# Altium PCB DriverPNP_Pcb.PcbDoc
Units mil, origin at the board's own origin, x right, y up, seen from the top; angles counter-clockwise.
Board outline 400 x 900 mil, 2 copper layers (Top Layer, Bottom Layer); 19 components, 26 nets, 60 pads, 4 vias.
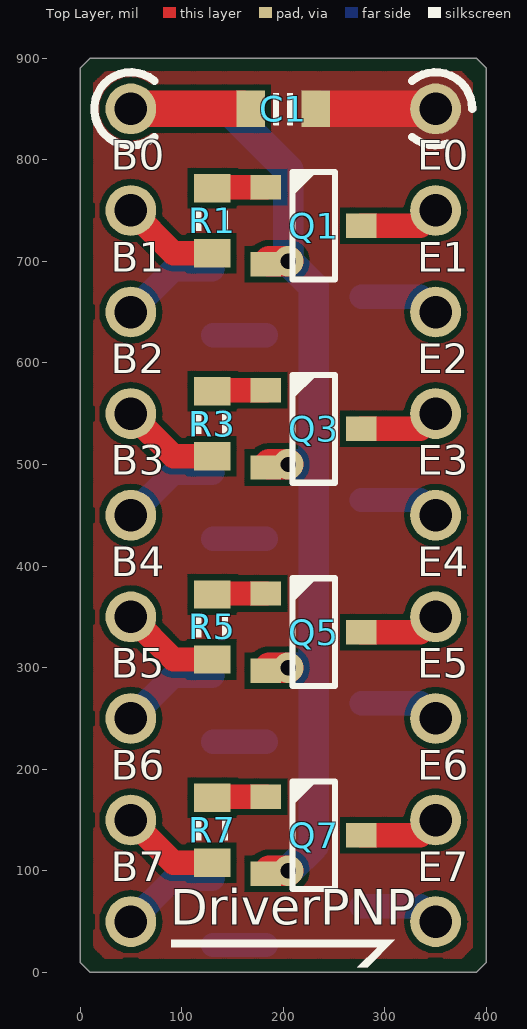
[diagram p0: Top Layer view]
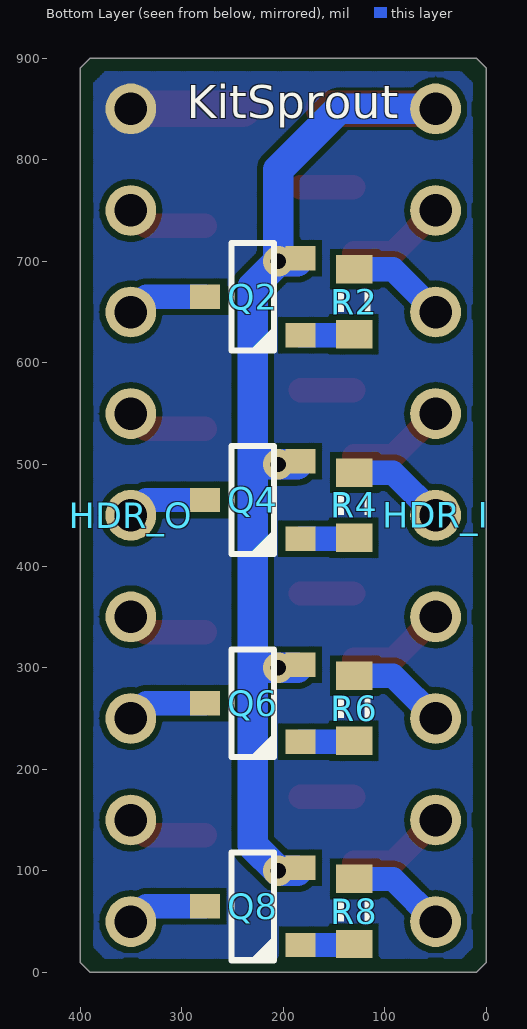
[diagram p1: Bottom Layer view, seen from below]
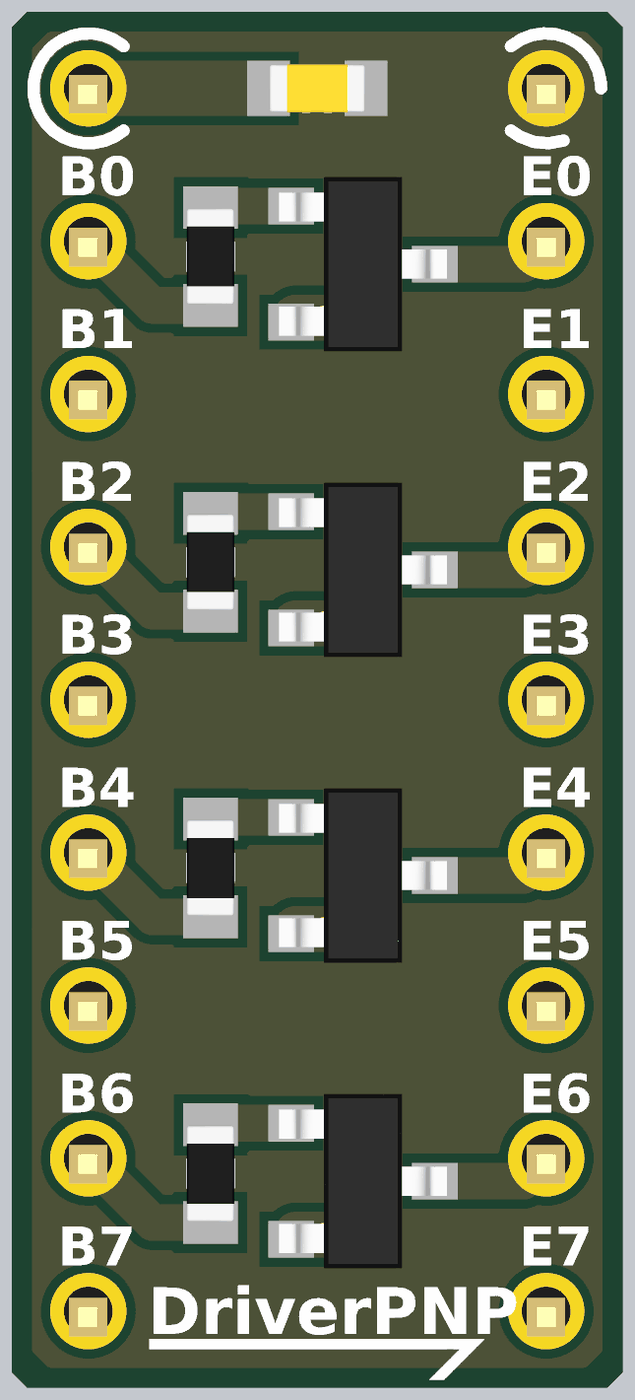
[diagram p2: 3D render of the assembled board from above, using the file's embedded part models]
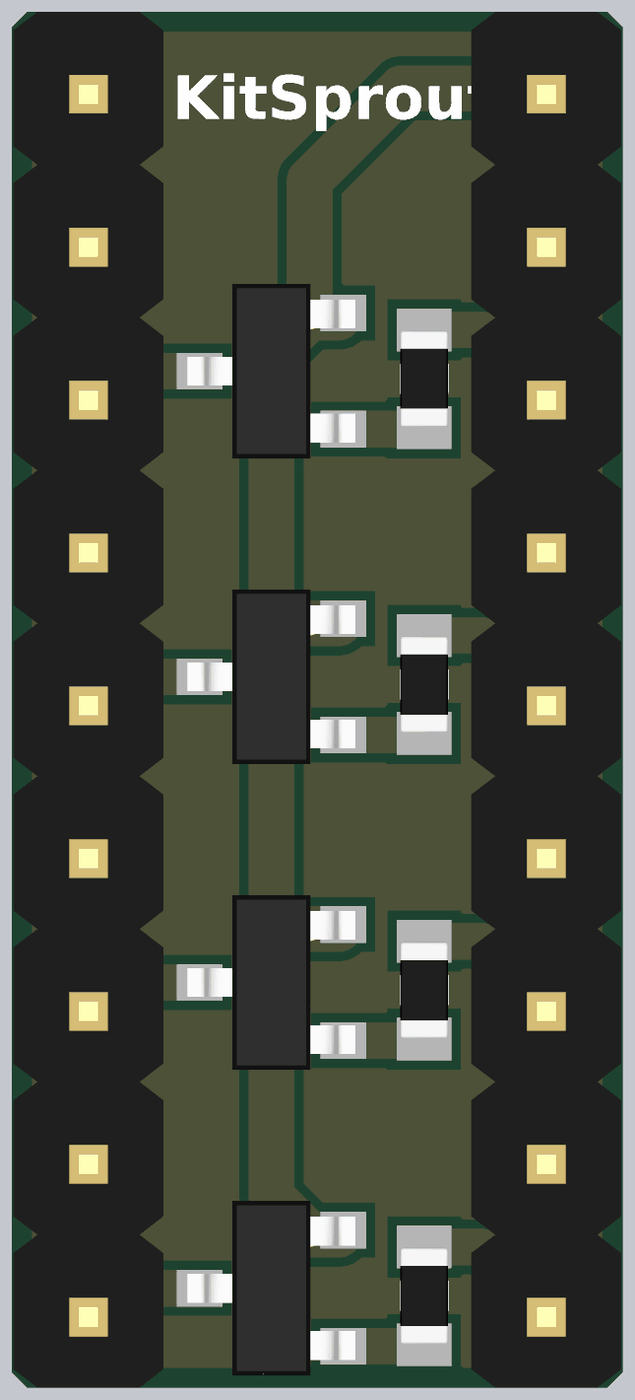
[diagram p3: 3D render of the assembled board from below, using the file's embedded part models]

## Layer stack, top to bottom
Top Solder: solder mask 0.4, Solder Resist, Dk 3.5
Top Layer: signal copper 1.4
Dielectric1: dielectric 12.6, FR-4, Dk 4.8
Bottom Layer: signal copper 1.4
Bottom Solder: solder mask 0.4, Solder Resist, Dk 3.5

## Board outline
0,10 10,0 390,0 400,10 400,890 390,900 10,900 0,890

## Design rules (kind name [scope] priority, off if disabled: settings)
Clearance ClearancePolygon [InPolygon] p1: gap=6
Clearance [All] p2: gap=6
ComponentClearance [All] p1: gap=0 collisioncheckmode=3 verticalgap=0 showdistances=FALSE
Height [All] p1: minheight=0 maxheight=5000 prefheight=500
HoleSize [All] p1: absolutevalues=TRUE maxlimit=200 minlimit=1 maxpercent=80.000 minpercent=20.000
HoleToHoleClearance [All] p1: gap=6 allowstackedmicrovias=TRUE
MinimumSolderMaskSliver [All] p1: minsoldermaskwidth=6
PlaneConnect [All] p1: planeconnectstyle=Direct reliefexpansion=20 reliefentries=4 reliefconductorwidth=20 reliefairgap=10
PolygonConnect [All] p1: connectstyle=Direct reliefconductorwidth=20 reliefentries=4 polygonreliefangle="90 Angle" airgapwidth=10
RoutingVias [All] p1: holewidth=12 width=20 viastyle="Through Hole" minholewidth=12 minwidth=20 maxholewidth=100 maxwidth=200
SilkToSilkClearance [All] p1: silktosilkclearance=0
SilkToSolderMaskClearance SilkscreenOverComponentPads [IsPad] p1: minsilkscreentomaskgap=1 clearancetoexposedcopper=TRUE
SolderMaskExpansion [All] p1: expansion=0
Width [All] p1: maxlimit=40 minlimit=6 preferedwidth=10
21 further rules are at their usual default settings.

## Components (designator, comment, footprint, x,y, rotation, side; value= is the part's Value field where it differs from the comment)
C1 "Cap_0603" CAP_0603 200,850 r180 top
HDR_I "HDR1x9.54" HDR1X9_2.54_180 50,850 r180 bottom
HDR_O "HDR1x9.54" HDR1X9_2.54_180 350,850 r180 bottom
Q1 "BJT_PNP" SOT23-3 230,735 r0 top
Q2 "BJT_PNP" SOT23-3 230,665 r0 bottom
Q3 "BJT_PNP" SOT23-3 230,535 r0 top
Q4 "BJT_PNP" SOT23-3 230,465 r0 bottom
Q5 "BJT_PNP" SOT23-3 230,335 r0 top
Q6 "BJT_PNP" SOT23-3 230,265 r0 bottom
Q7 "BJT_PNP" SOT23-3 230,135 r0 top
Q8 "BJT_PNP" SOT23-3 230,65 r0 bottom
R1 "Res_0603" RES_0603 130,740 r90 top
R2 "Res_0603" RES_0603 130,660 r270 bottom
R3 "Res_0603" RES_0603 130,540 r90 top
R4 "Res_0603" RES_0603 130,460 r270 bottom
R5 "Res_0603" RES_0603 130,340 r90 top
R6 "Res_0603" RES_0603 130,260 r270 bottom
R7 "Res_0603" RES_0603 130,140 r90 top
R8 "Res_0603" RES_0603 130,60 r270 bottom

## Footprints (in the part's own frame and the unit in brackets; to place one, negate y for a bottom-side part, rotate by r counter-clockwise, add the part's x,y. Pads: shape width x height; smd on the part's side, far side on the other; paste and mask are expansions set on the pad)
CAP_0603 [mil]
  rect 28x36 smd: 1(-32,0) 2(32,0)
  silkscreen extent -10,-16 10,16, body extent -31,-16 32,16, height 36
HDR1X9_2.54_180 [mil]
  round 50 hole 32: 1(0,0) 2(0,-100) 3(0,-200) 4(0,-300) 5(0,-400) 6(0,-500) 7(0,-600) 8(0,-700) 9(0,-800)
  body extent -49,-850 49,50, height 323
RES_0603 [mil]
  rect 28x36 smd: 1(-32,0) 2(32,0)
  silkscreen extent -10,-16 10,16, body extent -31,-16 32,16, height 20
SOT23-3 [mil]
  rect 30x24 smd: 1(-47,38) 2(-47,-38) 3(47,0)
  silkscreen extent -21,-53 21,53, body extent -55,-57 55,57, height 51

## Part data
C1: "Capacitor"
HDR_I: library part HDR1x9_2.54_T, "Header"
HDR_O: library part HDR1x9_2.54, "Header"
Q1 Q2 Q3 Q4 Q5 Q6 Q7 Q8: "Transistor"
R1 R2 R3 R4 R5 R6 R7 R8: "Resistor"

## Via types
v1: diameter 30, hole 15, Top Layer to Bottom Layer, 4 vias

## Nets (pads, with @x,y where several pads share a name; then routed paths per layer and width w, separated by ;. In a path a pad name is that pad's centre, name@x,y a point inside that pad or via, vN(x,y) a via of type N, cw(c..) or ccw(c..) an arc to the next point about the centre after c; other vN are vias at no path point)
B0: HDR_I.2 R1.1 | length 97.4
  Top Layer w24: HDR_I.2 92,708 R1.1
B1: HDR_I.3 R2.1 | length 97.4
  Bottom Layer w24: HDR_I.3 92,692 R2.1
B2: HDR_I.4 R3.1 | length 97.4
  Top Layer w24: HDR_I.4 92,508 R3.1
B3: HDR_I.5 R4.1 | length 97.4
  Bottom Layer w24: HDR_I.5 92,492 R4.1
B4: HDR_I.6 R5.1 | length 97.4
  Top Layer w24: HDR_I.6 92,308 R5.1
B5: HDR_I.7 R6.1 | length 97.4
  Bottom Layer w24: HDR_I.7 92,292 R6.1
B6: HDR_I.8 R7.1 | length 97.4
  Top Layer w24: HDR_I.8 92,108 R7.1
B7: HDR_I.9 R8.1 | length 97.4
  Bottom Layer w24: HDR_I.9 92,92 R8.1
E0: HDR_O.2 Q1.3 | length 79.2
  Top Layer w24: Q1.3 335,735 HDR_O.2
E1: HDR_O.3 Q2.3 | length 79.2
  Bottom Layer w24: Q2.3 335,665 HDR_O.3
E2: HDR_O.4 Q3.3 | length 79.2
  Top Layer w24: Q3.3 335,535 HDR_O.4
E3: HDR_O.5 Q4.3 | length 79.2
  Bottom Layer w24: Q4.3 335,465 HDR_O.5
E4: HDR_O.6 Q5.3 | length 79.2
  Top Layer w24: Q5.3 335,335 HDR_O.6
E5: HDR_O.7 Q6.3 | length 79.2
  Bottom Layer w24: Q6.3 335,265 HDR_O.7
E6: HDR_O.8 Q7.3 | length 79.2
  Top Layer w24: Q7.3 335,135 HDR_O.8
E7: HDR_O.9 Q8.3 | length 79.2
  Bottom Layer w24: Q8.3 335,65 HDR_O.9
GND: C1.1 HDR_O.1 | length 110
  Top Layer w36: C1.1@240,850 HDR_O.1
NetQ1_1: Q1.1 R1.2 | length 52
  Top Layer w24: R1.2@131,773 Q1.1
NetQ2_1: Q2.1 R2.2 | length 52
  Bottom Layer w24: R2.2@131,627 Q2.1
NetQ3_1: Q3.1 R3.2 | length 52
  Top Layer w24: R3.2@131,573 Q3.1
NetQ4_1: Q4.1 R4.2 | length 52
  Bottom Layer w24: R4.2@131,427 Q4.1
NetQ5_1: Q5.1 R5.2 | length 52
  Top Layer w24: R5.2@131,373 Q5.1
NetQ6_1: Q6.1 R6.2 | length 52
  Bottom Layer w24: R6.2@131,227 Q6.1
NetQ7_1: Q7.1 R7.2 | length 52
  Top Layer w24: R7.2@131,173 Q7.1
NetQ8_1: Q8.1 R8.2 | length 52
  Bottom Layer w24: R8.2@131,27 Q8.1
VCC: C1.2 HDR_I.1 Q1.2 Q2.2 Q3.2 Q4.2 Q5.2 Q6.2 Q7.2 Q8.2 | length 1202.6
  Top Layer w30: Q7.2@186,100 v1(205,100) ; Q5.2@186,300 v1(205,300) ; Q3.2@186,500 v1(205,500) ; Q1.2@186,700 v1(205,700)
  Top Layer w36: HDR_I.1 C1.2@160,850
  Bottom Layer w30: HDR_I.1 145,850 205,790 v1(205,700) ; Q8.2@186,100 v1(205,100) 230,125 230,675 v1(205,700) ; Q6.2@186,300 v1(205,300) 230,300 ; Q4.2@186,500 v1(205,500) 230,500 ; Q2.2@186,700 v1(205,700)

## Polygon pours and split planes (outlines as drawn)
GND on Bottom Layer "Mechanical 1-No Net" (hatched 90Degree grid 2 track 4, remove dead copper, pour order 4): 15,25 25,15 40,15 80,15 375,15 385,25 385,40 385,875 375,885 345,885 25,885 15,875 15,865
GND on Top Layer "Mechanical 1-No Net" (hatched 90Degree grid 2 track 4, remove dead copper, pour order 3): 15,25 25,15 40,15 80,15 375,15 385,25 385,40 385,875 375,885 345,885 25,885 15,875 15,865

## Silkscreen, mask and mechanical layers (free items; w line width, h text height)
Top Overlay:
  region: 90,32 310,32 283,5 273,5 293,25 90,25
  lines w8: 73.14,822.42 cw(c50,850) 73.14,877.58 ; 326.86,822.42 ccw(c350,850) 361.38,815.85 ; 326.86,877.58 cw(c350,850) 386,850
  text "B0" at 30,780 h50
  text "E0" at 332,780 h50
  text "B1" at 30,680 h50
  text "E1" at 332,680 h50
  text "B2" at 30,580 h50
  text "E2" at 332,580 h50
  text "B3" at 30,480 h50
  text "E3" at 332,480 h50
  text "B4" at 30,380 h50
  text "E4" at 332,380 h50
  text "B5" at 30,280 h50
  text "E5" at 332,280 h50
  text "B6" at 30,180 h50
  text "E6" at 332,180 h50
  text "B7" at 30,80 h50
  text "E7" at 332,80 h50
  text "DriverPNP" at 88.93,35 h60
Bottom Overlay:
  text "KitSprout" at 295,830 h56
Mechanical 1:
  the board outline again, w2
Drill Drawing:
  text ".legend" at 515,30 h60

## Dimensions
0,890 to 400,890 on Mechanical 13
390,900 to 390,0 on Mechanical 13